# Altium PCB NIXIEclockhis.PcbDoc (part 3 of 3)
Units mil, origin at the board's own origin, x right, y up, seen from the top; angles counter-clockwise.
Board outline 8475 x 2960 mil, 2 copper layers (Top Layer, Bottom Layer); 232 components, 292 nets, 854 pads, 247 vias.
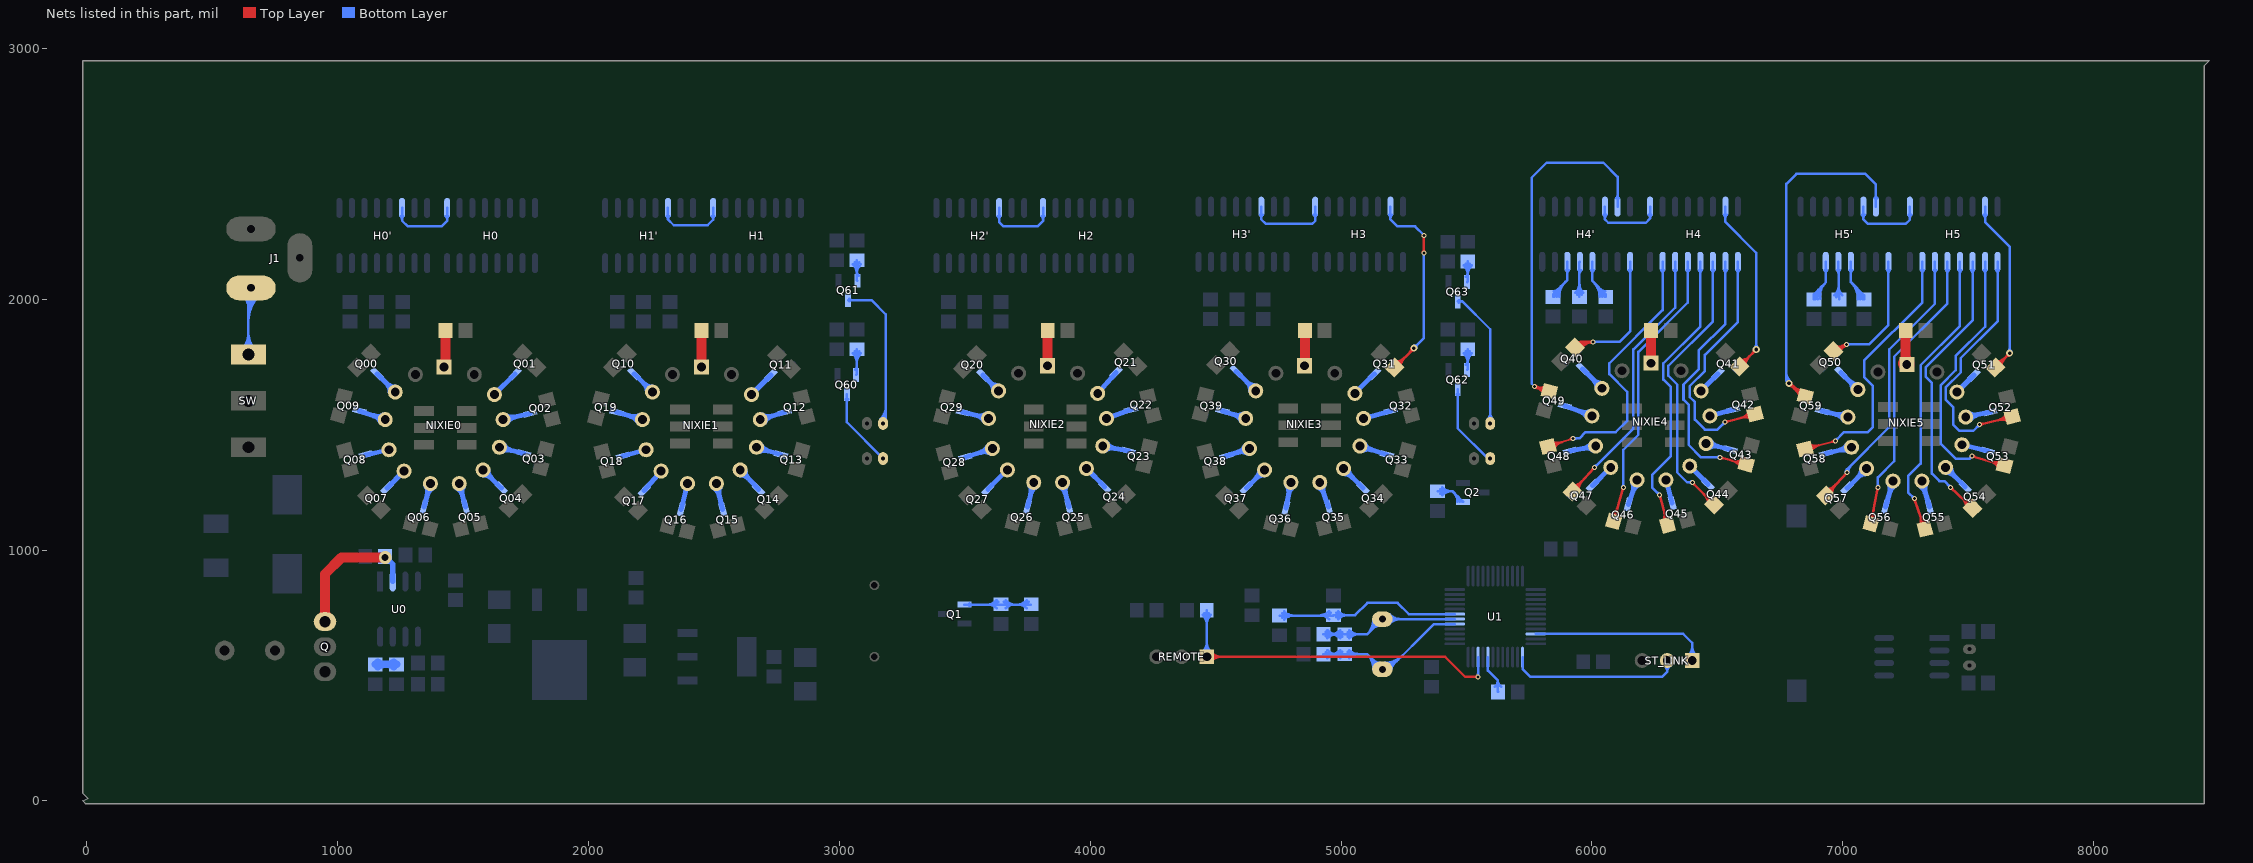
[diagram p3: the nets of this part, all layers, seen from the top]

## Via types
v1: diameter 20, hole 12, Top Layer to Bottom Layer, 132 vias
v2: diameter 28, hole 15, Top Layer to Bottom Layer, 84 vias
v3: diameter 30, hole 20, Top Layer to Bottom Layer, 23 vias
v4: diameter 118.11, hole 118.11, Top Layer to Bottom Layer, 4 vias
v5: diameter 50, hole 28, Top Layer to Bottom Layer, 2 vias
v6: diameter 59.06, hole 59.06, Top Layer to Bottom Layer, 2 vias

## Nets (pads, with @x,y where several pads share a name; then routed paths per layer and width w, separated by ;. In a path a pad name is that pad's centre, name@x,y a point inside that pad or via, vN(x,y) a via of type N, cw(c..) or ccw(c..) an arc to the next point about the centre after c; other vN are vias at no path point) (continued)
NetH3_15: H3.15 R90.2 | length 1047.4
  Top Layer w10: R90.2@5212.84,1727.16 5290,1804.32 v2(5290,1805) ; R90.2@5214.23,1741.11 ccw(c5214.23,1771.43) 5235.67,1749.99 ccw(c5257.11,1728.55) R90.2@5226.79,1728.55 ; R90.2@5214.23,1751.11 ccw(c5214.23,1805.57) 5252.74,1767.06 ccw(c5291.25,1728.55) R90.2@5236.79,1728.55 ; 5274.16,1788.48 ccw(c5257.64,1805) v2@5281,1805 ; 5275.79,1790.12 cw(c5290,1775.91) v2@5290,1796 ; v1@5326.46,2188.54 ccw(c5317.93,2197.07) 5330,2197.07 ccw(c5342.07,2197.07) v1@5333.54,2188.54 ; v1@5326.46,2251.46 cw(c5317.93,2242.93) 5330,2242.93 cw(c5342.07,2242.93) v1@5333.54,2251.46 ; v1@5330,2190 v1@5330,2250
  Bottom Layer w10: H3.15@5192.05,2336.05 cw(c5180.1,2324.1) 5197,2324.1 cw(c5213.9,2324.1) H3.15@5201.95,2336.05 ; H3.15@5197,2369 5197,2318 5225,2290 5295,2290 v1(5330,2255) v1@5330,2260 ; v2(5290,1805) 5330,1845 v1(5330,2185) ; v2@5290,1814 ccw(c5290,1835.73) 5305.36,1820.36 ccw(c5320.73,1805) v2@5299,1805
NetH4'_1: H4'.1 R106.1 | length 838.6
  Top Layer w10: R106.1@5927.42,1809.45 cw(c5958.96,1795.53) 5958.96,1830 ; R106.1@5932.84,1807.84 5955,1830 ; R106.1@5936.57,1805.41 cw(c5974.3,1788.75) 5974.3,1830 ; R106.1@5942.9,1828.03 ccw(c5947.58,1837.42) 5955,1830 ; R106.1@5945.72,1801.37 cw(c5989.65,1781.98) 5989.65,1830 ; R106.1@5953.03,1817.9 cw(c5962.42,1822.58) 5955,1830 ; R106.1@5954.87,1797.34 cw(c6005,1775.2) v1(6005,1830) 5955,1830 ; v1@6000.67,1832.5 cw(c5990.22,1838.53) 5993.34,1826.88 cw(c5996.46,1815.21) v1@6002.5,1825.67 ; v1@6001.46,1826.46 ccw(c5992.93,1817.93) 5992.93,1830 ccw(c5992.93,1842.07) v1@6001.46,1833.54
  Bottom Layer w10: v1(6005,1830) 6110,1830 6152,1872 H4'.1@6152,2149 ; v1@6008.54,1826.46 cw(c6017.07,1817.93) 6017.07,1830 cw(c6017.07,1842.07) v1@6008.54,1833.54 ; H4'.1@6147.05,2116.05 cw(c6135.1,2104.1) 6152,2104.1 cw(c6168.9,2104.1) H4'.1@6156.95,2116.05
NetH4'_4: H4'.4 R107.1 | length 350.1
  Bottom Layer w10: H4'.4@5997.05,2116.05 cw(c5985.1,2104.1) 6002,2104.1 cw(c6018.9,2104.1) H4'.4@6006.95,2116.05 ; H4'.4@6002,2149 6002,2073 6055,2020 R107.1@6055,2009.37 ; 6005.61,2069.39 cw(c5945.6,2009.37) R107.1@6030.47,2009.37 ; 6022.68,2052.32 cw(c5979.74,2009.37) R107.1@6040.47,2009.37 ; 6036.03,2038.97 ccw(c6053.03,2055.98) R107.1@6053.03,2031.93 ; R107.1@6039.75,2035.25 cw(c6013.88,2009.37) R107.1@6050.47,2009.37
NetH4'_5: H4'.5 R108.1 | length 300.2
  Bottom Layer w10: R108.1@5934.05,2025.32 ccw(c5895.54,2063.83) 5950,2063.83 ccw(c6004.46,2063.83) R108.1@5965.95,2025.32 ; R108.1@5941.12,2018.25 ccw(c5919.68,2039.69) 5950,2039.69 ccw(c5980.32,2039.69) R108.1@5958.88,2018.25 ; H4'.5@5947.05,2116.05 cw(c5939.93,2108.93) 5950,2108.93 ; R108.1@5950,2009.37 5950,2147 H4'.5@5952,2149 ; 5950,2099.27 cw(c5973.73,2099.27) H4'.5@5956.95,2116.05
NetH4'_6: H4'.6 R109.1 | length 351.8
  Bottom Layer w10: R109.1@5845,2009.37 5845,2020 5902,2077 H4'.6@5902,2149 ; R109.1@5846.97,2031.93 ccw(c5846.97,2055.98) 5863.97,2038.97 ; R109.1@5849.53,2009.37 cw(c5886.12,2009.37) R109.1@5860.25,2035.25 ; R109.1@5859.53,2009.37 cw(c5920.26,2009.37) 5877.32,2052.32 ; R109.1@5869.53,2009.37 cw(c5954.4,2009.37) 5894.39,2069.39 ; H4'.6@5897.05,2116.05 cw(c5885.1,2104.1) 5902,2104.1 cw(c5918.9,2104.1) H4'.6@5906.95,2116.05
NetH4'_15: H4'.15 R110.2 | length 1613.2
  Top Layer w10: v1(5771.96,1651.26) R110.2@5830.19,1633.03 ; v1@5773.05,1646.38 cw(c5776.54,1630.81) 5785.08,1644.28 ; v1@5774.28,1646.83 cw(c5779.87,1636.13) 5783.48,1647.65 cw(c5787.08,1659.17) v1@5776.39,1653.57 ; v1@5775.64,1654.64 ccw(c5787.63,1665.68) 5786.96,1649.39 ; v1@5776.15,1649.94 cw(c5759.8,1597.7) R110.2@5808.3,1623.08 ; v1@5776.53,1649.83 ccw(c5792.71,1701.54) R110.2@5817.83,1653.53 ; 5799.19,1642.73 cw(c5790.05,1613.53) R110.2@5817.16,1627.72 ; 5799.57,1642.61 ccw(c5808.54,1671.28) R110.2@5822.47,1644.67
  Bottom Layer w10: v1(5771.96,1651.26) 5760,1663.22 5760,2485 5820,2545 6045,2545 6102,2488 H4'.15@6102,2369 ; H4'.15@6097.05,2401.95 ccw(c6085.1,2413.9) 6102,2413.9 ccw(c6118.9,2413.9) H4'.15@6106.95,2401.95
NetH4_1: H4.1 R98.1 | length 1187.8
  Top Layer w10: v1(6530,1510) R98.1@6650.19,1541.97 ; v1@6532.51,1514.33 ccw(c6538.56,1524.77) 6541.67,1513.1 ccw(c6544.77,1501.44) v1@6534.33,1507.49 ; R98.1@6628.77,1552.78 cw(c6581.67,1580.09) 6595.66,1527.47 cw(c6609.65,1474.82) R98.1@6636.97,1521.95 ; R98.1@6637.42,1547.76 cw(c6611.2,1562.96) 6618.99,1533.67 cw(c6626.78,1504.36) R98.1@6641.99,1530.6
  Bottom Layer w10: v1@6525,1510 cw(c6512.93,1510) 6521.46,1501.46 cw(c6530,1492.93) v1@6530,1505 ; v1(6530,1510) 6500,1480 6450,1480 6410,1520 6410,1590 6390,1610 6390,1653.64 6450,1713.64 6450,1778 6582,1910 H4.1@6582,2149 ; H4.1@6577.05,2116.05 cw(c6565.1,2104.1) 6582,2104.1 cw(c6598.9,2104.1) H4.1@6586.95,2116.05
NetH4_2: H4.2 R99.1 | length 1258.3
  Top Layer w10: v1(6510,1370) R99.1@6614.81,1341.97 ; v1@6512.5,1365.67 cw(c6518.54,1355.22) 6521.66,1366.88 cw(c6524.78,1378.54) v1@6514.33,1372.5 ; R99.1@6593.38,1331.19 ccw(c6546.23,1303.94) 6560.3,1356.55 ccw(c6574.36,1409.17) R99.1@6601.62,1362.01 ; R99.1@6602.04,1336.2 ccw(c6575.79,1321.02) 6583.62,1350.31 ccw(c6591.45,1379.61) R99.1@6606.62,1353.35
  Bottom Layer w10: v1@6506.46,1366.46 ccw(c6497.93,1357.93) 6497.93,1370 ccw(c6497.93,1382.07) v1@6506.46,1373.54 ; v1(6510,1370) 6435,1370 6385,1420 6385,1580 6365,1600 6365,1660 6425,1720 6425,1795 6532,1902 H4.2@6532,2149 ; H4.2@6527.05,2116.05 cw(c6515.1,2104.1) 6532,2104.1 cw(c6548.9,2104.1) H4.2@6536.95,2116.05
NetH4_3: H4.3 R100.1 | length 1324.8
  Top Layer w10: v1@6399.98,1265 cw(c6399.93,1252.93) 6408.5,1261.43 cw(c6417.07,1269.93) v1@6405,1269.98 ; v1(6400,1270) R100.1@6487.16,1182.16 ; 6447.4,1222.23 cw(c6408.72,1183.85) R100.1@6463.21,1183.64 ; 6447.43,1222.2 ccw(c6486.07,1260.55) R100.1@6485.86,1206.11 ; 6464.41,1205.09 cw(c6442.86,1183.72) R100.1@6473.21,1183.6 ; 6464.43,1205.07 ccw(c6485.94,1226.41) R100.1@6485.82,1196.11
  Bottom Layer w10: v1@6396.46,1266.46 ccw(c6387.93,1257.93) 6387.93,1270 ccw(c6387.93,1282.07) v1@6396.46,1273.54 ; v1(6400,1270) 6380,1270 6340,1310 6340,1660 6305,1695 6305,1735 6482,1912 H4.3@6482,2149 ; H4.3@6477.05,2116.05 cw(c6465.1,2104.1) 6482,2104.1 cw(c6498.9,2104.1) H4.3@6486.95,2116.05
NetH4_4: H4.4 R101.1 | length 1367.8
  Top Layer w10: v1@6267.49,1215.67 cw(c6261.44,1205.23) 6273.1,1208.33 cw(c6284.77,1211.44) v1@6274.33,1217.49 ; v1(6270,1220) R101.1@6301.97,1099.81 ; R101.1@6281.95,1113.03 ccw(c6234.82,1140.35) 6287.46,1154.35 ccw(c6340.09,1168.33) R101.1@6312.78,1121.23 ; R101.1@6290.6,1108.01 ccw(c6264.36,1123.22) 6293.67,1131.02 ccw(c6322.96,1138.8) R101.1@6307.76,1112.58
  Bottom Layer w10: v1@6265,1220 ccw(c6252.93,1220) 6261.46,1228.54 ccw(c6270,1237.07) v1@6270,1225 ; v1(6270,1220) 6240,1250 6240,1300 6315,1375 6315,1650 6285,1680 6285,1745 6432,1892 H4.4@6432,2149 ; H4.4@6427.05,2116.05 cw(c6415.1,2104.1) 6432,2104.1 cw(c6448.9,2104.1) H4.4@6436.95,2116.05
NetH4_5: H4.5 R102.1 | length 1343.2
  Top Layer w10: R102.1@6076.46,1136.77 ccw(c6049.81,1184.37) 6102.31,1169.56 ; R102.1@6081.34,1128.05 ccw(c6066.49,1154.58) 6095.75,1146.33 ; R102.1@6086.97,1115.19 v1(6125,1250) ; 6095.72,1146.21 ccw(c6124.82,1138) R102.1@6098.44,1123.23 ; 6102.27,1169.44 ccw(c6154.61,1154.68) R102.1@6107.16,1128.11 ; v1@6120.64,1247.56 cw(c6110.11,1241.66) 6121.72,1238.38 cw(c6133.34,1235.11) v1@6127.44,1245.64
  Bottom Layer w10: v1@6121.46,1253.54 ccw(c6112.93,1262.07) 6125,1262.07 ccw(c6137.07,1262.07) v1@6128.54,1253.54 ; v1(6125,1250) 6125,1400 6185,1460 6185,1790 6382,1987 H4.5@6382,2149 ; H4.5@6377.05,2116.05 cw(c6365.1,2104.1) 6382,2104.1 cw(c6398.9,2104.1) H4.5@6386.95,2116.05
NetH4_6: H4.6 R103.1 | length 1281
  Top Layer w10: R103.1@5922.16,1232.84 v1(6010,1330) ; R103.1@5922.42,1256.76 ccw(c5919.69,1310.82) 5959.84,1274.52 ; R103.1@5922.92,1246.77 ccw(c5921.41,1276.72) 5943.65,1256.61 ; R103.1@5936.1,1234.86 cw(c5966.72,1236.41) 5943.97,1256.97 ; R103.1@5946.08,1235.37 cw(c6000.81,1238.12) 5960.16,1274.87 ; v1@6005.01,1329.75 cw(c5992.95,1329.14) 6001.9,1321.05 cw(c6010.86,1312.95) v1@6010.25,1325.01
  Bottom Layer w10: v1(6010,1330) 6165,1485 6165,1800 6332,1967 H4.6@6332,2149 ; v1@6010,1335 ccw(c6010,1347.07) 6018.54,1338.54 ccw(c6027.07,1330) v1@6015,1330 ; H4.6@6327.05,2116.05 cw(c6315.1,2104.1) 6332,2104.1 cw(c6348.9,2104.1) H4.6@6336.95,2116.05
NetH4_7: H4.7 R104.1 | length 1297.6
  Top Layer w10: R104.1@5824.81,1413.03 v1(5925,1445) ; R104.1@5832.47,1424.7 ccw(c5846.23,1451.36) 5855.36,1422.78 ; R104.1@5837.06,1433.58 ccw(c5861.89,1481.7) 5878.36,1430.12 ; R104.1@5837.87,1407.78 cw(c5865.1,1393.73) 5855.78,1422.91 ; R104.1@5846.76,1403.19 cw(c5895.43,1378.07) 5878.78,1430.25 ; v1@5920.56,1447.29 cw(c5909.83,1452.83) 5913.5,1441.33 cw(c5917.17,1429.83) v1@5922.71,1440.56
  Bottom Layer w10: v1(5925,1445) 5950,1445 5975,1470 6095,1470 6140,1515 6140,1631.36 6070,1701.36 6070,1745 6282,1957 H4.7@6282,2149 ; v1@5928.54,1441.46 cw(c5937.07,1432.93) 5937.07,1445 cw(c5937.07,1457.07) v1@5928.54,1448.54 ; H4.7@6277.05,2116.05 cw(c6265.1,2104.1) 6282,2104.1 cw(c6298.9,2104.1) H4.7@6286.95,2116.05
NetH4_15: H4.15 R105.2 | length 943.6
  Top Layer w10: R105.2@6587.84,1732.16 6655,1799.32 v2(6655,1800) ; R105.2@6589.23,1746.11 ccw(c6589.23,1776.43) 6610.67,1754.99 ccw(c6632.11,1733.55) R105.2@6601.79,1733.55 ; R105.2@6589.23,1756.11 ccw(c6589.23,1810.57) 6627.74,1772.06 ccw(c6666.25,1733.55) R105.2@6611.79,1733.55 ; 6639.16,1783.48 ccw(c6622.64,1800) v2@6646,1800 ; 6640.79,1785.12 cw(c6655,1770.91) v2@6655,1791
  Bottom Layer w10: H4.15@6527.05,2336.05 cw(c6515.1,2324.1) 6532,2324.1 cw(c6548.9,2324.1) H4.15@6536.95,2336.05 ; H4.15@6532,2369 6532,2308 6655,2185 v2(6655,1800) ; v2@6648.64,1806.36 ccw(c6633.27,1821.73) 6655,1821.73 ccw(c6676.73,1821.73) v2@6661.36,1806.36
NetH5'_1: H5'.1 R119.1 | length 722.8
  Top Layer w10: R119.1@6962.84,1792.84 v1(7015,1820) ; R119.1@6971.01,1812.96 ccw(c6985.46,1858.79) v1@7007.65,1816.17 ; R119.1@6976.21,1787.67 cw(c7011.24,1776.63) 6994.28,1809.21 ; R119.1@6985.75,1784.67 cw(c7043.8,1766.37) v1@7015.69,1820.36 ; 6998.62,1814.17 ccw(c6994.42,1833.1) v1@7010.78,1822.69 ; 7005.88,1811.37 ccw(c6997.26,1820.77) v1@7010,1820.22 ; 7006.6,1812.02 cw(c7014.29,1803.63) v1@7014.78,1815 ; v1@7010.23,1821.5 cw(c6998.72,1825.13) 7004.29,1814.42 cw(c7009.87,1803.72) v1@7013.5,1815.23
  Bottom Layer w10: v1(7015,1820) 7105,1820 7182,1897 H5'.1@7182,2149 ; v1@7018.54,1816.46 cw(c7027.07,1807.93) 7027.07,1820 cw(c7027.07,1832.07) v1@7018.54,1823.54 ; H5'.1@7177.05,2116.05 cw(c7165.1,2104.1) 7182,2104.1 cw(c7198.9,2104.1) H5'.1@7186.95,2116.05
NetH5'_4: H5'.4 R121.1 | length 369.7
  Bottom Layer w10: H5'.4@7027.05,2116.05 cw(c7015.1,2104.1) 7032,2104.1 cw(c7048.9,2104.1) H5'.4@7036.95,2116.05 ; H5'.4@7032,2149 7032,2068 7085,2015 R121.1@7085,1999.37 ; 7032.08,2067.92 cw(c6963.52,1999.37) R121.1@7060.47,1999.37 ; 7049.15,2050.85 cw(c6997.67,1999.37) R121.1@7070.47,1999.37 ; 7066.22,2033.78 cw(c7031.81,1999.37) R121.1@7080.47,1999.37
NetH5'_5: H5'.5 R122.1 | length 290.8
  Bottom Layer w10: R122.1@6966.76,2015 ccw(c6922.64,2057.38) 6983.81,2058.61 ; R122.1@6973.97,2008.07 ccw(c6947.26,2033.73) 6984.3,2034.47 ; H5'.5@6977.15,2115.95 cw(c6964.12,2102.38) 6982.93,2102.76 ; H5'.5@6982,2149 R122.1@6985,1999.37 ; 6982.87,2105.47 cw(c6997.85,2105.77) H5'.5@6987.05,2116.15 ; 6984,2049.11 ccw(c7031.74,2050.07) R122.1@6998.66,2015.64
NetH5'_6: H5'.6 R123.1 | length 365.1
  Bottom Layer w10: R123.1@6885,1999.37 6885,2020 6932,2067 ; R123.1@6889.51,1999.67 cw(c6935.51,2005.02) 6902.77,2037.77 ; R123.1@6899.44,2000.82 cw(c6961.7,2008.06) 6917.38,2052.38 ; R123.1@6909.38,2001.98 cw(c6987.89,2011.11) 6932,2067 ; H5'.6@6927.05,2116.05 cw(c6915.1,2104.1) 6932,2104.1 cw(c6948.9,2104.1) H5'.6@6936.95,2116.05 ; H5'.6@6932,2149 6932,2067
NetH5'_15: H5'.15 R124.2 | length 1688.5
  Top Layer w10: v2@6785,1656 cw(c6785,1634.27) 6800.36,1649.64 cw(c6815.73,1665) v2@6794,1665 ; v2(6785,1665) 6836.97,1613.03 R124.2@6850.19,1613.03 ; v2@6787.3,1656.3 cw(c6791.4,1640.76) 6799.49,1654.65 ; v2@6789.59,1660.41 ccw(c6848.29,1719.11) R124.2@6848.29,1636.1 ; v2@6793.7,1667.3 ccw(c6820.18,1674.3) 6806.4,1650.62 ; 6806.66,1643.34 ccw(c6848.29,1684.97) R124.2@6848.29,1626.1 ; 6818.14,1631.86 cw(c6799.82,1613.54) R124.2@6825.73,1613.54 ; R124.2@6823.73,1626.27 ccw(c6848.29,1650.83) R124.2@6848.29,1616.1
  Bottom Layer w10: 6775,1686.73 ccw(c6806.73,1686.73) v2@6784.29,1664.29 ; 6775,1710.87 ccw(c6830.87,1710.87) v2@6791.36,1671.36 ; v2(6785,1665) 6775,1675 6775,2460 6815,2500 7090,2500 7132,2458 H5'.15@7132,2369 ; H5'.15@7127.05,2401.95 ccw(c7115.1,2413.9) 7132,2413.9 ccw(c7148.9,2413.9) H5'.15@7136.95,2401.95
NetH5_1: H5.1 R111.1 | length 1204.6
  Top Layer w10: v1(7545,1500) R111.1@7675.19,1531.97 ; v1@7547.59,1504.28 ccw(c7553.84,1514.6) 7556.72,1502.88 ccw(c7559.6,1491.16) v1@7549.28,1497.41 ; 7620.29,1518.49 cw(c7633.31,1465.46) R111.1@7661.6,1512.17 ; 7620.48,1518.54 ccw(c7607.53,1571.29) R111.1@7653.99,1543.15 ; 7643.74,1524.25 cw(c7651,1494.66) R111.1@7666.78,1520.72 ; 7643.93,1524.29 ccw(c7636.73,1553.6) R111.1@7662.55,1537.97
  Bottom Layer w10: v1@7540,1500 cw(c7527.93,1500) 7536.46,1491.46 cw(c7545,1482.93) v1@7545,1495 ; v1(7545,1500) 7520,1475 7465,1475 7440,1500 7440,1570 7410,1600 7410,1648.64 7470,1708.64 7470,1765 7617,1912 H5.1@7617,2149 ; H5.1@7612.05,2116.05 cw(c7600.1,2104.1) 7617,2104.1 cw(c7633.9,2104.1) H5.1@7621.95,2116.05
NetH5_2: H5.2 R112.1 | length 1265.3
  Top Layer w10: v1(7515,1375) R112.1@7644.81,1336.97 ; v1@7517.4,1370.61 cw(c7523.19,1360.02) 7526.58,1371.61 cw(c7529.98,1383.19) v1@7519.39,1377.4 ; 7590.55,1352.87 cw(c7575.2,1300.45) R112.1@7623.12,1326.66 ; 7590.76,1352.81 ccw(c7606.03,1404.92) R112.1@7632.09,1357.27 ; 7613.72,1346.08 cw(c7605.15,1316.83) R112.1@7631.89,1331.46 ; 7613.93,1346.02 ccw(c7622.41,1374.97) R112.1@7636.88,1348.5
  Bottom Layer w10: v1(7515,1375) 7505,1365 7450,1365 7390,1425 7390,1656.92 7450,1716.92 7450,1773.28 7567,1890.28 H5.2@7567,2149 ; H5.2@7562.05,2116.05 cw(c7550.1,2104.1) 7567,2104.1 cw(c7583.9,2104.1) H5.2@7571.95,2116.05
NetH5_3: H5.3 R113.1 | length 1347.5
  Top Layer w10: v1(7430,1250) R113.1@7517.16,1167.16 ; v1@7430.13,1245 cw(c7430.43,1232.93) 7438.75,1241.68 cw(c7447.07,1250.43) v1@7435,1250.13 ; 7476.17,1206.12 ccw(c7513.81,1245.72) R113.1@7515.2,1191.1 ; 7476.35,1205.95 cw(c7438.94,1166.6) R113.1@7493.22,1167.98 ; 7493.67,1189.49 ccw(c7514.67,1211.59) R113.1@7515.45,1181.11 ; 7493.84,1189.32 cw(c7473.07,1167.47) R113.1@7503.21,1168.23
  Bottom Layer w10: v1@7425,1250 ccw(c7412.93,1250) 7421.46,1258.54 ccw(c7430,1267.07) v1@7430,1255 ; v1(7430,1250) 7405,1275 7385,1275 7355,1305 7355,1666.36 7330,1691.36 7330,1728.64 7517,1915.64 H5.3@7517,2149 ; H5.3@7512.05,2116.05 cw(c7500.1,2104.1) 7517,2104.1 cw(c7533.9,2104.1) H5.3@7521.95,2116.05
NetH5_4: H5.4 R114.1 | length 1365
  Top Layer w10: v1@7282.83,1200.5 cw(c7277.58,1189.62) 7288.98,1193.6 cw(c7300.38,1197.58) v1@7289.5,1202.83 ; v1(7285,1205) R114.1@7326.97,1084.81 ; R114.1@7306.14,1096.51 ccw(c7257.54,1119.96) 7308.48,1137.75 ; 7308.25,1138.41 ccw(c7360.14,1156.53) R114.1@7336.26,1107.03 ; R114.1@7315.15,1092.17 ccw(c7288.29,1105.12) 7316.44,1114.96 ; 7316.21,1115.62 ccw(c7345.31,1125.78) R114.1@7331.92,1098.02
  Bottom Layer w10: v1@7280,1205 ccw(c7267.93,1205) 7276.46,1213.54 ccw(c7285,1222.07) v1@7285,1210 ; v1(7285,1205) 7260,1230 7260,1295 7310,1345 7310,1736.92 7467,1893.92 H5.4@7467,2149 ; H5.4@7462.05,2116.05 cw(c7450.1,2104.1) 7467,2104.1 cw(c7483.9,2104.1) H5.4@7471.95,2116.05
NetH5_5: H5.5 R115.1 | length 1358.9
  Top Layer w10: R115.1@7099.85,1125.78 ccw(c7069.63,1170.52) 7122.63,1160.26 ; R115.1@7105.45,1117.5 ccw(c7088.74,1142.23) 7118.04,1136.56 ; R115.1@7111.97,1105.19 v1(7140,1250) ; 7118.17,1137.21 ccw(c7148.4,1131.36) R115.1@7122.89,1114.12 ; 7122.76,1160.92 ccw(c7176.69,1150.48) R115.1@7131.17,1119.72 ; v1@7135.86,1247.2 cw(c7125.85,1240.44) 7137.71,1238.15 cw(c7149.56,1235.86) v1@7142.8,1245.86
  Bottom Layer w10: v1@7136.46,1253.54 ccw(c7127.93,1262.07) 7140,1262.07 ccw(c7152.07,1262.07) v1@7143.54,1253.54 ; v1(7140,1250) 7140,1290 7205,1355 7205,1771.21 7417,1983.21 H5.5@7417,2149 ; H5.5@7412.05,2116.05 cw(c7400.1,2104.1) 7417,2104.1 cw(c7433.9,2104.1) H5.5@7421.95,2116.05
NetH5_6: H5.6 R116.1 | length 1329.1
  Top Layer w10: R116.1@6932.16,1217.84 v1(7016.36,1310) ; R116.1@6932.54,1241.77 ccw(c6930.09,1295.87) 6970.08,1259.34 ; R116.1@6932.99,1231.78 ccw(c6931.63,1261.76) 6953.79,1241.52 ; R116.1@6946.1,1219.8 cw(c6976.69,1221.18) 6954.08,1241.83 ; R116.1@6956.09,1220.25 cw(c7010.8,1222.72) 6970.37,1259.66
  Bottom Layer w10: v1@7011.36,1310 cw(c7026.72,1310) 7015.86,1320.86 ; v1@7012.98,1313.69 ccw(c7005.96,1321.36) 7016.36,1321.36 ; v1(7016.36,1310) 7016.36,1321.36 ; v1@7019.74,1313.69 cw(c7026.77,1321.36) 7016.36,1321.36 ; v1@7021.36,1310 cw(c7060.86,1310) 7032.93,1337.93 ; H5.6@7362.05,2116.05 cw(c7350.1,2104.1) 7367,2104.1 cw(c7383.9,2104.1) H5.6@7371.95,2116.05 ; H5.6@7367,2149 7367,1982 7185,1800 7185,1490 7016.36,1321.36
NetH5_7: H5.7 R117.1 | length 1264.4
  Top Layer w10: R117.1@6849.81,1403.03 v1(6970,1435) ; R117.1@6858.01,1414.4 ccw(c6873.22,1440.64) 6881.02,1411.33 ccw(c6888.8,1382.04) R117.1@6862.58,1397.24 ; R117.1@6863.03,1423.05 ccw(c6890.35,1470.18) 6904.35,1417.54 ccw(c6918.33,1364.91) R117.1@6871.23,1392.22 ; v1@6965.67,1437.51 cw(c6955.23,1443.56) 6958.33,1431.9 cw(c6961.44,1420.23) v1@6967.49,1430.67
  Bottom Layer w10: v1(6970,1435) 7005,1470 7100,1470 7120,1490 7120,1655 7085,1690 7085,1755 7317,1987 H5.7@7317,2149 ; v1@6970,1440 ccw(c6970,1452.07) 6978.54,1443.54 ccw(c6987.07,1435) v1@6975,1435 ; H5.7@7312.05,2116.05 cw(c7300.1,2104.1) 7317,2104.1 cw(c7333.9,2104.1) H5.7@7321.95,2116.05
NetH5_15: H5.15 R118.2 | length 934.1
  Top Layer w10: R118.2@7607.84,1727.16 7665,1784.32 v2(7665,1785) ; R118.2@7609.23,1741.11 ccw(c7609.23,1771.43) 7630.67,1749.99 ccw(c7652.11,1728.55) R118.2@7621.79,1728.55 ; R118.2@7609.23,1751.11 ccw(c7609.23,1805.57) 7647.74,1767.06 ccw(c7686.25,1728.55) R118.2@7631.79,1728.55 ; 7649.16,1768.48 ccw(c7632.64,1785) v2@7656,1785 ; 7650.79,1770.12 cw(c7665,1755.91) v2@7665,1776
  Bottom Layer w10: H5.15@7562.05,2336.05 cw(c7550.1,2324.1) 7567,2324.1 cw(c7583.9,2324.1) H5.15@7571.95,2336.05 ; H5.15@7567,2369 7567,2308 7665,2210 v2(7665,1785) ; v2@7658.64,1791.36 ccw(c7643.27,1806.73) 7665,1806.73 ccw(c7686.73,1806.73) v2@7671.36,1791.36
NetJ1_1: J1.1 SW.3 | length 915.8
  Bottom Layer w10: SW.3@620.7,1804.3 ccw(c562.02,1862.98) 645,1862.98 ccw(c727.98,1862.98) SW.3@669.3,1804.3 ; J1.1@623.74,2013.74 cw(c572.4,1962.4) 645,1962.4 cw(c737.6,1962.4) J1.1@672.12,2027.88 ; SW.3@627.77,1797.23 ccw(c586.17,1838.83) 645,1838.83 ccw(c703.83,1838.83) SW.3@662.23,1797.23 ; J1.1@630.81,2020.81 cw(c596.55,1986.55) 645,1986.55 cw(c713.45,1986.55) J1.1@665.05,2034.95 ; SW.3@645,1780 645,2035 J1.1@655,2045 ; 645,1914.12 cw(c785.88,1914.12) J1.1@686.26,2013.74 ; 645,1938.26 cw(c761.74,1938.26) J1.1@679.19,2020.81
NetNeon0_2: Neon0.2 Q60.1 | length 342.3
  Bottom Layer w10: Q60.1@3025.18,1601.05 cw(c3013.56,1589.42) 3030,1589.42 cw(c3046.44,1589.42) Q60.1@3034.82,1601.05 ; Q60.1@3030,1621.61 3030,1509.57 Neon0.2@3174.57,1365
NetNeon1_2: Neon1.2 Q61.1 | length 731.3
  Bottom Layer w10: Q61.1@3035,1996.61 3128.39,1996.61 3185,1940 3185,1515.43 Neon1.2@3174.57,1505 ; Q61.1@3039.82,1991.8 cw(c3051.44,1980.17) 3051.44,1996.61 cw(c3051.44,2013.06) Q61.1@3039.82,2001.43 ; Neon1.2@3164.18,1521.29 ccw(c3113.93,1571.55) 3185,1571.55 ; Neon1.2@3171.25,1514.22 ccw(c3138.07,1547.4) 3185,1547.4
NetNeon2_2: Neon2.2 Q62.1 | length 362.1
  Bottom Layer w10: Q62.1@5460.18,1621.05 cw(c5448.56,1609.42) 5465,1609.42 cw(c5481.44,1609.42) Q62.1@5469.82,1621.05 ; Q62.1@5465,1641.61 5465,1485 5585,1365 Neon2.2@5594.57,1365 Neon2.2@5594.57,1365.43
NetNeon3_2: Neon3.2 Q63.1 | length 632.6
  Bottom Layer w10: Q63.1@5465,1991.61 5483.39,1991.61 5594.57,1880.43 Neon3.2@5594.57,1505 ; Q63.1@5469.82,1986.8 cw(c5481.44,1975.17) 5481.44,1991.61 cw(c5481.44,2008.06) Q63.1@5469.82,1996.43 ; Neon3.2@5584.18,1521.29 ccw(c5559.11,1546.36) 5594.57,1546.36 ccw(c5630.02,1546.36) Neon3.2@5604.95,1521.29
NetNIXIE0_a: NIXIE0.a R130.1 | length 173.4
  Top Layer w40: NIXIE0.a@1417.93,1737.07 ccw(c1387.27,1767.73) 1430.63,1767.73 ; NIXIE0.a@1430.63,1735.63 R130.1@1430.63,1875
NetNIXIE1_a: NIXIE1.a R131.1 | length 144.4
  Top Layer w40: NIXIE1.a@2450.63,1730.63 R131.1@2450.63,1875
NetNIXIE2_a: NIXIE2.a R132.1 | length 139.4
  Top Layer w40: NIXIE2.a@3830.63,1735.63 R132.1@3830.63,1875
NetNIXIE3_a: NIXIE3.a R133.1 | length 139.4
  Top Layer w40: NIXIE3.a@4855.63,1735.63 R133.1@4855.63,1875
NetNIXIE4_a: NIXIE4.a R134.1 | length 129.4
  Top Layer w40: NIXIE4.a@6235,1745 R134.1@6235,1874.37
NetNIXIE5_a: NIXIE5.a R135.1 | length 167.5
  Top Layer w40: NIXIE5.a@7250.63,1744.37 R135.1@7250.63,1875 ; 7250.63,1774.69 ccw(c7289.69,1774.69) NIXIE5.a@7262.07,1747.07
  Top Layer w60: NIXIE5.a@7250.63,1744.37 NIXIE5.a@7255,1740
NetQ1_2: Q1.2 R160.2 R161.2 | length 634.4
  Bottom Layer w10: Q1.2@3498.39,782.4 R160.2@3763.03,782.4 ; Q1.2@3518.95,777.59 cw(c3530.58,765.96) 3530.58,782.4 cw(c3530.58,798.84) Q1.2@3518.95,787.22 ; 3583.82,782.4 ccw(c3583.82,843.58) R161.2@3627.08,800.32 ; 3593.32,782.4 cw(c3593.32,734.66) R161.2@3627.08,768.42 ; 3607.96,782.4 ccw(c3607.96,819.44) R161.2@3634.15,793.25 ; R161.2@3655.85,793.25 ccw(c3682.04,819.44) 3682.04,782.4 ; R161.2@3662.92,768.42 cw(c3696.68,734.66) 3696.68,782.4 ; R161.2@3662.92,800.32 ccw(c3706.18,843.58) 3706.18,782.4 ; 3703.82,782.4 ccw(c3703.82,843.58) R160.2@3747.08,800.32 ; 3713.32,782.4 cw(c3713.32,734.66) R160.2@3747.08,768.42 ; 3727.96,782.4 ccw(c3727.96,819.44) R160.2@3754.15,793.25
NetQ2_2: Q2.2 R140.1 | length 323.5
  Bottom Layer w10: R140.1@5385,1234.37 5444.84,1234.37 Q2.2@5486.61,1192.6 ; R140.1@5395.85,1225.49 cw(c5417.29,1204.05) 5417.29,1234.37 cw(c5417.29,1264.69) R140.1@5395.85,1243.25 ; R140.1@5402.92,1218.42 cw(c5441.43,1179.91) 5441.43,1234.37 cw(c5441.43,1288.83) R140.1@5402.92,1250.32 ; 5448.1,1231.11 cw(c5409.59,1192.6) Q2.2@5464.06,1192.6 ; 5465.17,1214.04 cw(c5443.74,1192.6) Q2.2@5474.06,1192.6 ; Q2.2@5482.25,1196.97 cw(c5477.88,1192.6) Q2.2@5484.06,1192.6
NetQ60_3: Q60.3 R170.1 | length 256.4
  Bottom Layer w10: R170.1@3054.05,1784.68 cw(c3015.54,1746.17) 3070,1746.17 cw(c3124.46,1746.17) R170.1@3085.95,1784.68 ; R170.1@3061.12,1791.75 cw(c3039.68,1770.31) 3070,1770.31 cw(c3100.32,1770.31) R170.1@3078.88,1791.75 ; Q60.3@3062.59,1718.95 ccw(c3044.69,1736.85) 3070,1736.85 ; Q60.3@3067.4,1698.39 3070,1700.98 R170.1@3070,1800.63
NetQ61_3: Q61.3 R171.1 | length 235.8
  Bottom Layer w10: R171.1@3054.05,2139.68 cw(c3015.54,2101.17) 3070,2101.17 cw(c3124.46,2101.17) R171.1@3085.95,2139.68 ; R171.1@3061.12,2146.75 cw(c3039.68,2125.31) 3070,2125.31 cw(c3100.32,2125.31) R171.1@3078.88,2146.75 ; 3070,2111.37 ccw(c3094.64,2111.37) Q61.3@3077.22,2093.95 ; R171.1@3070,2155.63 3070,2075.79 Q61.3@3072.4,2073.39
NetQ62_3: Q62.3 R172.1 | length 236.4
  Bottom Layer w10: R172.1@5489.05,1784.68 cw(c5450.54,1746.17) 5505,1746.17 cw(c5559.46,1746.17) R172.1@5520.95,1784.68 ; R172.1@5496.12,1791.75 cw(c5474.68,1770.31) 5505,1770.31 cw(c5535.32,1770.31) R172.1@5513.88,1791.75 ; Q62.3@5497.59,1738.95 ccw(c5479.69,1756.85) 5505,1756.85 ; Q62.3@5502.4,1718.39 5505,1720.98 R172.1@5505,1800.63
NetQ63_3: Q63.3 R173.1 | length 236.4
  Bottom Layer w10: R173.1@5489.05,2134.68 cw(c5450.54,2096.17) 5505,2096.17 cw(c5559.46,2096.17) R173.1@5520.95,2134.68 ; R173.1@5496.12,2141.75 cw(c5474.68,2120.31) 5505,2120.31 cw(c5535.32,2120.31) R173.1@5513.88,2141.75 ; Q63.3@5497.59,2088.95 ccw(c5479.69,2106.85) 5505,2106.85 ; Q63.3@5502.4,2068.39 5505,2070.98 R173.1@5505,2150.63
NetQ_2: Q.3 R10.2 U0.2 | length 633.1
  Top Layer w10: v5(1189.37,970.63) v5@1190,970
  Top Layer w40: Q.3@937.63,727.37 ccw(c907.75,757.25) 950,757.25 ccw(c992.25,757.25) Q.3@962.37,727.37 ; Q.3@950,715 950,905 1015,970 v5@1189.37,970
  Bottom Layer w20: R10.2@1191.56,972.82 1220,944.37 U0.2@1220,875
NetR11_2: R11.2 R13.1 | length 180.3
  Bottom Layer w30: R13.1@1150,544.37 R11.2@1235,544.37 ; R13.1@1160.85,535.49 cw(c1182.29,514.05) 1182.29,544.37 cw(c1182.29,574.69) R13.1@1160.85,553.25 ; R11.2@1224.15,535.49 ccw(c1202.71,514.05) 1202.71,544.37 ccw(c1202.71,574.69) R11.2@1224.15,553.25
NetR22_1: R22.1 U1.44 | length 212.7
  Bottom Layer w10: U1.44@5585.47,573.58 5585.47,519.53 5625,480 ; R22.1@5612.37,455.22 ccw(c5594.38,480) 5625,480 ; R22.1@5625.63,435 5625,435.63 5625,480 ; R22.1@5638.03,455.81 cw(c5653.96,480) 5625,480
NIXIE0.0: NIXIE0.l Q00.1 | length 178.9
  Bottom Layer w20: Q00.1@1157.14,1702.86 NIXIE0.l@1230,1630 ; NIXIE0.l@1210,1630 ccw(c1161.72,1630) 1195.86,1664.14 ccw(c1230,1698.28) NIXIE0.l@1230,1650
NIXIE0.1: NIXIE0.c Q01.1 | length 117.2
  Bottom Layer w20: NIXIE0.c@1625,1620 Q01.1@1707.86,1702.86
NIXIE0.2: NIXIE0.d Q02.1 | length 186.6
  Bottom Layer w20: NIXIE0.d@1660,1520 Q02.1@1767.92,1545.07 ; NIXIE0.d@1670.58,1536.97 ccw(c1696.11,1577.96) 1707.03,1530.92 ccw(c1717.96,1483.89) NIXIE0.d@1676.97,1509.42
NIXIE0.3: NIXIE0.e Q03.1 | length 176.9
  Bottom Layer w20: NIXIE0.e@1645,1410 Q03.1@1742.92,1384.93 ; NIXIE0.e@1655.19,1392.79 cw(c1679.8,1351.25) 1691.78,1398.03 cw(c1703.75,1444.8) NIXIE0.e@1662.21,1420.19
NIXIE0.4: NIXIE0.f Q04.1 | length 178.9
  Bottom Layer w20: NIXIE0.f@1580,1300 cw(c1580,1251.72) 1614.14,1285.86 cw(c1648.28,1320) NIXIE0.f@1600,1320 ; NIXIE0.f@1580,1320 Q04.1@1652.86,1247.14
NIXIE0.5: NIXIE0.g Q05.1 | length 172.1
  Bottom Layer w20: NIXIE0.g@1475.03,1247.66 cw(c1450.96,1205.81) 1497.57,1218.38 cw(c1544.19,1230.96) NIXIE0.g@1502.34,1255.03 ; NIXIE0.g@1485,1265 Q05.1@1510.07,1172.08
NIXIE0.6: NIXIE0.h Q06.1 | length 172.1
  Bottom Layer w20: Q06.1@1344.93,1172.08 NIXIE0.h@1370,1265 ; NIXIE0.h@1352.66,1255.03 cw(c1310.81,1230.96) 1357.43,1218.38 cw(c1404.04,1205.81) NIXIE0.h@1379.97,1247.66
NIXIE0.7: NIXIE0.i Q07.1 | length 96
  Bottom Layer w20: Q07.1@1197.14,1247.14 NIXIE0.i@1265,1315
NIXIE0.8: NIXIE0.j Q08.1 | length 95.1
  Bottom Layer w20: Q08.1@1112.08,1379.93 NIXIE0.j@1205,1400
NIXIE0.9: NIXIE0.k Q09.1 | length 184.6
  Bottom Layer w20: Q09.1@1087.08,1555.07 NIXIE0.k@1190,1520 ; NIXIE0.k@1172.05,1511.17 ccw(c1128.72,1489.87) 1144.3,1535.57 ccw(c1159.87,1581.28) NIXIE0.k@1181.17,1537.95
NIXIE1.0: NIXIE1.l Q10.1 | length 178.9
  Bottom Layer w20: Q10.1@2182.14,1702.86 NIXIE1.l@2255,1630 ; NIXIE1.l@2235,1630 ccw(c2186.72,1630) 2220.86,1664.14 ccw(c2255,1698.28) NIXIE1.l@2255,1650
NIXIE1.1: NIXIE1.c Q11.1 | length 110.1
  Bottom Layer w20: NIXIE1.c@2650,1620 Q11.1@2727.86,1697.86
NIXIE1.2: NIXIE1.d Q12.1 | length 178.3
  Bottom Layer w20: NIXIE1.d@2685,1520 Q12.1@2782.92,1550.07 ; NIXIE1.d@2694.37,1537.67 ccw(c2716.99,1580.33) 2731.16,1534.17 ccw(c2745.33,1488.01) NIXIE1.d@2702.67,1510.63
NIXIE1.3: NIXIE1.e Q13.1 | length 178.3
  Bottom Layer w20: NIXIE1.e@2670,1410 Q13.1@2767.92,1379.93 ; NIXIE1.e@2679.37,1392.33 cw(c2701.99,1349.67) 2716.16,1395.83 cw(c2730.33,1441.99) NIXIE1.e@2687.67,1419.37
NIXIE1.4: NIXIE1.f Q14.1 | length 182.5
  Bottom Layer w20: NIXIE1.f@2604.34,1300.01 cw(c2602.74,1251.75) 2637.99,1284.74 cw(c2673.25,1317.74) NIXIE1.f@2624.99,1319.34 ; NIXIE1.f@2605,1320 Q14.1@2677.86,1242.14
NIXIE1.5: NIXIE1.g Q15.1 | length 181.8
  Bottom Layer w20: NIXIE1.g@2499.61,1247.91 cw(c2474.51,1206.66) 2521.42,1218.09 cw(c2568.34,1229.51) NIXIE1.g@2527.09,1254.61 ; NIXIE1.g@2510,1265 Q15.1@2535.07,1162.08
NIXIE1.6: NIXIE1.h Q16.1 | length 105.9
  Bottom Layer w20: Q16.1@2369.93,1162.08 NIXIE1.h@2395,1265
NIXIE1.7: NIXIE1.i Q17.1 | length 103.3
  Bottom Layer w20: Q17.1@2222.14,1237.14 NIXIE1.i@2290,1315
NIXIE1.8: NIXIE1.j Q18.1 | length 96.2
  Bottom Layer w20: Q18.1@2137.08,1374.93 NIXIE1.j@2230,1400
NIXIE1.9: NIXIE1.k Q19.1 | length 183.1
  Bottom Layer w20: Q19.1@2112.08,1550.07 NIXIE1.k@2215,1520 ; NIXIE1.k@2197.46,1510.39 ccw(c2155.11,1487.19) 2168.65,1533.54 ccw(c2182.19,1579.89) NIXIE1.k@2205.39,1537.54
NIXIE2.0: NIXIE2.l Q20.1 | length 164.7
  Bottom Layer w20: Q20.1@3572.14,1697.86 NIXIE2.l@3635,1635 ; NIXIE2.l@3615,1635 ccw(c3566.72,1635) 3600.86,1669.14 ccw(c3635,1703.28) NIXIE2.l@3635,1655
NIXIE2.1: NIXIE2.c Q21.1 | length 110.3
  Bottom Layer w20: NIXIE2.c@4030,1625 Q21.1@4102.86,1707.86
NIXIE2.2: NIXIE2.d Q22.1 | length 104
  Bottom Layer w20: NIXIE2.d@4065,1525 Q22.1@4162.92,1560.07
NIXIE2.3: NIXIE2.e Q23.1 | length 180.7
  Bottom Layer w20: NIXIE2.e@4050,1415 Q23.1@4152.92,1394.93 ; NIXIE2.e@4061.17,1398.41 cw(c4088.15,1358.37) 4097.39,1405.76 cw(c4106.63,1453.15) NIXIE2.e@4066.59,1426.17
NIXIE2.4: NIXIE2.f Q24.1 | length 103
  Bottom Layer w20: NIXIE2.f@3985,1325 Q24.1@4057.86,1252.14
NIXIE2.5: NIXIE2.g Q25.1 | length 176.9
  Bottom Layer w20: NIXIE2.g@3879.81,1252.79 cw(c3855.2,1211.25) 3901.97,1223.22 cw(c3948.75,1235.2) NIXIE2.g@3907.21,1259.81 ; NIXIE2.g@3890,1270 Q25.1@3915.06,1172.08
NIXIE2.6: NIXIE2.h Q26.1 | length 176.9
  Bottom Layer w20: Q26.1@3749.93,1172.08 NIXIE2.h@3775,1270 ; NIXIE2.h@3757.79,1259.81 cw(c3716.25,1235.2) 3763.03,1223.22 cw(c3809.8,1211.25) NIXIE2.h@3785.19,1252.79
NIXIE2.7: NIXIE2.i Q27.1 | length 110.1
  Bottom Layer w20: Q27.1@3592.14,1242.14 NIXIE2.i@3670,1320
NIXIE2.8: NIXIE2.j Q28.1 | length 189.3
  Bottom Layer w20: Q28.1@3502.08,1369.93 NIXIE2.j@3610,1405 ; NIXIE2.j@3592.18,1414.08 cw(c3549.16,1436) 3564.08,1390.08 cw(c3579,1344.16) NIXIE2.j@3600.92,1387.18
NIXIE2.9: NIXIE2.k Q29.1 | length 181.8
  Bottom Layer w20: Q29.1@3492.08,1550.07 NIXIE2.k@3595,1525 ; NIXIE2.k@3577.91,1514.61 ccw(c3536.66,1489.51) 3548.09,1536.42 ccw(c3559.51,1583.34) NIXIE2.k@3584.61,1542.09
NIXIE3.0: NIXIE3.l Q30.1 | length 186
  Bottom Layer w20: Q30.1@4582.14,1712.86 NIXIE3.l@4660,1635 ; NIXIE3.l@4640,1635 ccw(c4591.72,1635) 4625.86,1669.14 ccw(c4660,1703.28) NIXIE3.l@4660,1655
NIXIE3.1: NIXIE3.c Q31.1 | length 110.1
  Bottom Layer w20: NIXIE3.c@5055,1625 Q31.1@5132.86,1702.86
NIXIE3.2: NIXIE3.d Q32.1 | length 112
  Bottom Layer w20: NIXIE3.d@5090,1525 Q32.1@5197.92,1555.07
NIXIE3.3: NIXIE3.e Q33.1 | length 189.3
  Bottom Layer w20: NIXIE3.e@5075,1415 Q33.1@5182.92,1379.93 ; NIXIE3.e@5084.08,1397.18 cw(c5106,1354.16) 5120.92,1400.08 cw(c5135.84,1446) NIXIE3.e@5092.82,1424.08
NIXIE3.4: NIXIE3.f Q34.1 | length 186
  Bottom Layer w20: NIXIE3.f@5010,1305 cw(c5010,1256.72) 5044.14,1290.86 cw(c5078.28,1325) NIXIE3.f@5030,1325 ; NIXIE3.f@5010,1325 Q34.1@5087.86,1247.14
NIXIE3.5: NIXIE3.g Q35.1 | length 179.9
  Bottom Layer w20: NIXIE3.g@4906.45,1251.92 cw(c4885.82,1208.26) 4931.28,1224.54 cw(c4976.74,1240.82) NIXIE3.g@4933.08,1261.45 ; NIXIE3.g@4915,1270 Q35.1@4950.06,1172.08
NIXIE3.6: NIXIE3.h Q36.1 | length 180.7
  Bottom Layer w20: Q36.1@4779.94,1167.08 NIXIE3.h@4800,1270 ; NIXIE3.h@4783.41,1258.83 cw(c4743.37,1231.85) 4790.76,1222.61 cw(c4838.15,1213.37) NIXIE3.h@4811.17,1253.41
NIXIE3.7: NIXIE3.i Q37.1 | length 178.9
  Bottom Layer w20: Q37.1@4622.14,1247.14 NIXIE3.i@4695,1320 ; NIXIE3.i@4675,1320 cw(c4626.72,1320) 4660.86,1285.86 cw(c4695,1251.72) NIXIE3.i@4695,1300
NIXIE3.8: NIXIE3.j Q38.1 | length 173.5
  Bottom Layer w20: Q38.1@4542.08,1374.93 NIXIE3.j@4635,1405 ; NIXIE3.j@4617.19,1414.1 cw(c4574.2,1436.08) 4589.06,1390.14 cw(c4603.92,1344.2) NIXIE3.j@4625.9,1387.19
NIXIE3.9: NIXIE3.k Q39.1 | length 173.5
  Bottom Layer w20: Q39.1@4527.08,1555.07 NIXIE3.k@4620,1525 ; NIXIE3.k@4602.19,1515.9 ccw(c4559.2,1493.92) 4574.06,1539.86 ccw(c4588.92,1585.8) NIXIE3.k@4610.9,1542.81
NIXIE4.0: NIXIE4.l Q40.1 | length 186
  Bottom Layer w20: Q40.1@5962.14,1722.86 NIXIE4.l@6040,1645 ; NIXIE4.l@6020,1645 ccw(c5971.72,1645) 6005.86,1679.14 ccw(c6040,1713.28) NIXIE4.l@6040,1665
NIXIE4.1: NIXIE4.c Q41.1 | length 96
  Bottom Layer w20: NIXIE4.c@6435,1635 Q41.1@6502.86,1702.86
NIXIE4.2: NIXIE4.d Q42.1 | length 96.2
  Bottom Layer w20: NIXIE4.d@6470,1535 Q42.1@6562.92,1560.07
NIXIE4.3: NIXIE4.e Q43.1 | length 176.9
  Bottom Layer w20: NIXIE4.e@6455,1425 Q43.1@6552.92,1399.93 ; NIXIE4.e@6465.19,1407.79 cw(c6489.8,1366.25) 6501.78,1413.03 cw(c6513.75,1459.8) NIXIE4.e@6472.21,1435.19
NIXIE4.4: NIXIE4.f Q44.1 | length 103
  Bottom Layer w20: NIXIE4.f@6390,1335 Q44.1@6462.86,1262.14
NIXIE4.5: NIXIE4.g Q45.1 | length 96.2
  Bottom Layer w20: NIXIE4.g@6295,1280 Q45.1@6320.06,1187.08
NIXIE4.6: NIXIE4.h Q46.1 | length 179.9
  Bottom Layer w20: Q46.1@6144.94,1182.08 NIXIE4.h@6180,1280 ; NIXIE4.h@6161.92,1271.45 cw(c6118.26,1250.82) 6163.72,1234.54 cw(c6209.18,1218.26) NIXIE4.h@6188.55,1261.92
NIXIE4.7: NIXIE4.i Q47.1 | length 103
  Bottom Layer w20: Q47.1@6002.14,1257.14 NIXIE4.i@6075,1330
NIXIE4.8: NIXIE4.j Q48.1 | length 180.7
  Bottom Layer w20: Q48.1@5912.08,1394.93 NIXIE4.j@6015,1415 ; NIXIE4.j@5998.41,1426.17 cw(c5958.37,1453.15) 5967.61,1405.76 cw(c5976.85,1358.37) NIXIE4.j@6003.83,1398.41
NIXIE4.9: NIXIE4.k Q49.1 | length 191
  Bottom Layer w20: Q49.1@5892.08,1575.07 NIXIE4.k@6000,1535 ; NIXIE4.k@5981.82,1526.66 ccw(c5937.93,1506.54) 5954.73,1551.8 ccw(c5971.54,1597.07) NIXIE4.k@5991.66,1553.18
NIXIE5.0: NIXIE5.l Q50.1 | length 171.8
  Bottom Layer w20: Q50.1@6992.14,1707.86 NIXIE5.l@7060,1640 ; NIXIE5.l@7040,1640 ccw(c6991.72,1640) 7025.86,1674.14 ccw(c7060,1708.28) NIXIE5.l@7060,1660
NIXIE5.1: NIXIE5.c Q51.1 | length 96
  Bottom Layer w20: NIXIE5.c@7455,1630 Q51.1@7522.86,1697.86
NIXIE5.2: NIXIE5.d Q52.1 | length 175.8
  Bottom Layer w20: NIXIE5.d@7490,1530 Q52.1@7587.92,1550.07 ; NIXIE5.d@7501.02,1546.69 ccw(c7527.61,1586.99) 7537.3,1539.69 ccw(c7546.99,1492.39) NIXIE5.d@7506.69,1518.98
NIXIE5.3: NIXIE5.e Q53.1 | length 105.9
  Bottom Layer w20: NIXIE5.e@7475,1420 Q53.1@7577.92,1394.93
NIXIE5.4: NIXIE5.f Q54.1 | length 186
  Bottom Layer w20: NIXIE5.f@7410,1310 cw(c7410,1261.72) 7444.14,1295.86 cw(c7478.28,1330) NIXIE5.f@7430,1330 ; NIXIE5.f@7410,1330 Q54.1@7487.86,1252.14
NIXIE5.5: NIXIE5.g Q55.1 | length 183.1
  Bottom Layer w20: NIXIE5.g@7305.39,1257.46 cw(c7282.19,1215.11) 7328.54,1228.65 cw(c7374.89,1242.19) NIXIE5.g@7332.54,1265.39 ; NIXIE5.g@7315,1275 Q55.1@7345.07,1172.08
NIXIE5.6: NIXIE5.h Q56.1 | length 183.1
  Bottom Layer w20: Q56.1@7169.93,1172.08 NIXIE5.h@7200,1275 ; NIXIE5.h@7182.46,1265.39 cw(c7140.11,1242.19) 7186.46,1228.65 cw(c7232.81,1215.11) NIXIE5.h@7209.61,1257.46
NIXIE5.7: NIXIE5.i Q57.1 | length 186
  Bottom Layer w20: Q57.1@7017.14,1247.14 NIXIE5.i@7095,1325 ; NIXIE5.i@7075,1325 cw(c7026.72,1325) 7060.86,1290.86 cw(c7095,1256.72) NIXIE5.i@7095,1305
NIXIE5.8: NIXIE5.j Q58.1 | length 181.8
  Bottom Layer w20: Q58.1@6932.08,1384.93 NIXIE5.j@7035,1410 ; NIXIE5.j@7017.91,1420.39 cw(c6976.66,1445.49) 6988.09,1398.58 cw(c6999.51,1351.66) NIXIE5.j@7024.61,1392.91
NIXIE5.9: NIXIE5.k Q59.1 | length 181.8
  Bottom Layer w20: Q59.1@6917.08,1555.07 NIXIE5.k@7020,1530 ; NIXIE5.k@7002.91,1519.61 ccw(c6961.66,1494.51) 6973.09,1541.42 ccw(c6984.51,1588.34) NIXIE5.k@7009.61,1547.09
OSCIN: C26.2 R21.1 U1.5 Y1.2 | length 1396.6
  Bottom Layer w10: C26.2@4929.37,585 5014.37,585 R21.1@5015,585.63 5104.37,585.63 ; C26.2@4938.25,576.12 cw(c4959.69,554.68) 4959.69,585 cw(c4959.69,615.32) C26.2@4938.25,593.88 ; C26.2@4945.32,569.05 cw(c4983.83,530.54) 4983.83,585 cw(c4983.83,639.46) C26.2@4945.32,600.95 ; 4957.05,585 ccw(c4957.05,641.61) R21.1@4997.08,601.58 ; 4960.09,585 cw(c4960.09,532.69) R21.1@4997.08,569.68 ; 4981.19,585 ccw(c4981.19,617.47) R21.1@5004.15,594.51 ; 4984.23,585 cw(c4984.23,556.83) R21.1@5004.15,576.75 ; R21.1@5025.85,576.75 cw(c5047.29,555.31) 5047.29,585.63 cw(c5047.29,615.95) R21.1@5025.85,594.51 ; R21.1@5032.92,569.68 cw(c5071.43,531.17) 5071.43,585.63 cw(c5071.43,640.09) R21.1@5032.92,601.58 ; 5121.19,568.81 cw(c5078.2,525.81) Y1.2@5139,525.17 ; 5127.69,562.31 ccw(c5155,589.63) Y1.2@5155,551 ; Y1.2@5129,525.27 ccw(c5044.91,526.16) 5104.37,585.63 ; 5138.01,551.99 cw(c5111.49,525.46) Y1.2@5149,525.06 ; Y1.2@5175,531 ccw(c5175,581.7) 5210.85,545.85 ; Y1.2@5175,541 ccw(c5175,615.84) 5227.92,562.92 ; Y1.2@5175,551 ccw(c5175,649.98) 5244.99,579.99 ; Y1.2@5201,525 cw(c5227.56,525) 5208.78,543.78 ; U1.5@5453.58,705.47 5370.47,705.47 5190,525 Y1.2@5165,525 5104.37,585.63
OSCOUT: C25.2 R21.2 U1.6 Y1.1 | length 1284
  Bottom Layer w10: C25.2@4929.37,665 4930,664.37 R21.2@5015,664.37 5104.37,664.37 ; C25.2@4938.25,656.12 cw(c4958.17,636.2) 4958.17,664.37 ; C25.2@4938.25,673.88 ccw(c4961.21,696.84) 4961.21,664.37 ; C25.2@4945.32,649.05 cw(c4982.31,612.06) 4982.31,664.37 ; C25.2@4945.32,680.95 ccw(c4985.35,720.98) 4985.35,664.37 ; R21.2@4997.08,648.42 ccw(c4958.57,609.91) 4958.57,664.37 ccw(c4958.57,718.83) R21.2@4997.08,680.32 ; R21.2@5004.15,655.49 ccw(c4982.71,634.05) 4982.71,664.37 ccw(c4982.71,694.69) R21.2@5004.15,673.25 ; R21.2@5025.85,655.49 cw(c5047.29,634.05) 5047.29,664.37 cw(c5047.29,694.69) R21.2@5025.85,673.25 ; R21.2@5032.92,648.42 cw(c5071.43,609.91) 5071.43,664.37 cw(c5071.43,718.83) R21.2@5032.92,680.32 ; 5121.19,681.19 ccw(c5078.19,724.19) Y1.1@5139,724.83 ; 5127.69,687.69 cw(c5155,660.37) Y1.1@5155,699 ; Y1.1@5129,724.73 cw(c5044.9,723.84) 5104.37,664.37 ; 5138.01,698.01 ccw(c5111.48,724.54) Y1.1@5149,724.94 ; Y1.1@5186.31,713.69 cw(c5214.01,685.99) 5214.01,725.16 ; Y1.1@5186.31,736.31 ccw(c5213.25,763.25) 5213.25,725.16 ; Y1.1@5193.38,706.62 cw(c5238.15,661.85) 5238.15,725.16 ; Y1.1@5193.38,743.38 ccw(c5237.39,787.39) 5237.39,725.16 ; U1.6@5453.58,725.16 5165.16,725.16 Y1.1@5165,725 5104.37,664.37
QH'.SI.0: H0'.14 H0.9 | length 354.7
  Bottom Layer w10: H0'.14@1252.05,2331.05 cw(c1240.1,2319.1) 1257,2319.1 cw(c1273.9,2319.1) H0'.14@1261.95,2331.05 ; H0'.14@1257,2364 1257,2313 1280,2290 1415,2290 1437,2312 H0.9@1437,2364 ; H0.9@1432.05,2331.05 cw(c1420.1,2319.1) 1437,2319.1 cw(c1453.9,2319.1) H0.9@1441.95,2331.05
QH'.SI.1: H1'.14 H1.9 | length 344.7
  Bottom Layer w10: H1'.14@2312.05,2331.05 cw(c2300.1,2319.1) 2317,2319.1 cw(c2333.9,2319.1) H1'.14@2321.95,2331.05 ; H1'.14@2317,2364 2317,2318 2340,2295 2475,2295 2497,2317 H1.9@2497,2364 ; H1.9@2492.05,2331.05 cw(c2480.1,2319.1) 2497,2319.1 cw(c2513.9,2319.1) H1.9@2501.95,2331.05
QH'.SI.2: H2'.14 H2.9 | length 352.7
  Bottom Layer w10: H2'.14@3632.05,2331.05 cw(c3620.1,2319.1) 3637,2319.1 cw(c3653.9,2319.1) H2'.14@3641.95,2331.05 ; H2'.14@3637,2364 3637,2308 3655,2290 3790,2290 3812,2312 H2.9@3812,2364 ; H2.9@3807.05,2331.05 cw(c3795.1,2319.1) 3812,2319.1 cw(c3828.9,2319.1) H2.9@3816.95,2331.05
QH'.SI.3: H3'.14 H3.9 | length 388.5
  Bottom Layer w10: H3'.14@4677.05,2336.05 cw(c4665.1,2324.1) 4682,2324.1 cw(c4698.9,2324.1) H3'.14@4686.95,2336.05 ; H3'.14@4682,2369 4682,2318 4700,2300 4885,2300 4897,2312 H3.9@4897,2369 ; H3.9@4892.05,2336.05 cw(c4880.1,2324.1) 4897,2324.1 cw(c4913.9,2324.1) H3.9@4901.95,2336.05
QH'.SI.4: H4'.14 H4.9 | length 343.5
  Bottom Layer w10: H4'.14@6047.05,2336.05 cw(c6035.1,2324.1) 6052,2324.1 cw(c6068.9,2324.1) H4'.14@6056.95,2336.05 ; H4'.14@6052,2369 6052,2318 6065,2305 6215,2305 6232,2322 H4.9@6232,2369 ; H4.9@6227.05,2336.05 cw(c6215.1,2324.1) 6232,2324.1 cw(c6248.9,2324.1) H4.9@6236.95,2336.05
QH'.SI.5: H5'.14 H5.9 | length 355.6
  Bottom Layer w10: H5'.14@7077.05,2336.05 cw(c7065.1,2324.1) 7082,2324.1 cw(c7098.9,2324.1) H5'.14@7086.95,2336.05 ; H5'.14@7082,2369 7082,2318 7100,2300 7250,2300 7267,2317 H5.9@7267,2369 ; H5.9@7262.05,2336.05 cw(c7250.1,2324.1) 7267,2324.1 cw(c7283.9,2324.1) H5.9@7271.95,2336.05
REMOTE: R150.2 REMOTE.1 U1.46 | length 1838.2
  Top Layer w10: REMOTE.1@4465,575 5415,575 5495,495 v1(5545,495) ; REMOTE.1@4475.27,564.73 cw(c4500.07,539.93) 4500.07,575 cw(c4500.07,610.07) REMOTE.1@4475.27,585.27 ; REMOTE.1@4482.34,557.66 cw(c4524.21,515.79) 4524.21,575 cw(c4524.21,634.21) REMOTE.1@4482.34,592.34 ; v1@5541.46,491.46 ccw(c5532.93,482.93) 5532.93,495 ccw(c5532.93,507.07) v1@5541.46,498.54
  Bottom Layer w10: REMOTE.1@4447.66,592.34 ccw(c4407.31,632.69) 4464.37,632.69 ; R150.2@4448.42,742.08 cw(c4409.91,703.57) 4464.37,703.57 cw(c4518.83,703.57) R150.2@4480.32,742.08 ; REMOTE.1@4454.73,585.27 ccw(c4431.45,608.55) 4464.37,608.55 ; R150.2@4455.49,749.15 cw(c4434.05,727.71) 4464.37,727.71 cw(c4494.69,727.71) R150.2@4473.25,749.15 ; 4464.37,611.59 ccw(c4501.59,611.59) REMOTE.1@4475.27,585.27 ; 4464.37,635.74 ccw(c4525.74,635.74) REMOTE.1@4482.34,592.34 ; R150.2@4464.37,760 4464.37,575.63 REMOTE.1@4465,575 ; v1@5541.46,498.54 ccw(c5530.27,509.73) 5546.1,509.73 ; v1(5545,495) 5546.1,496.1 U1.46@5546.1,573.58
REST: C20.2 R20.2 U1.7 | length 1117.2
  Bottom Layer w10: C20.2@4755,739.37 4968.74,739.37 R20.2@4970,740.63 5055.63,740.63 5105,790 5225,790 5269.84,745.16 5270.16,745.16 ; C20.2@4765.85,730.49 cw(c4787.29,709.05) 4787.29,739.37 cw(c4787.29,769.69) C20.2@4765.85,748.25 ; C20.2@4772.92,723.42 cw(c4811.43,684.91) 4811.43,739.37 cw(c4811.43,793.83) C20.2@4772.92,755.32 ; 4910.53,739.37 ccw(c4910.53,798.13) R20.2@4952.08,756.58 ; 4916.61,739.37 cw(c4916.61,689.21) R20.2@4952.08,724.68 ; 4934.67,739.37 ccw(c4934.67,773.99) R20.2@4959.15,749.51 ; R20.2@4980.85,731.75 cw(c5002.29,710.31) 5002.29,740.63 cw(c5002.29,770.95) R20.2@4980.85,749.51 ; R20.2@4987.92,724.68 cw(c5026.43,686.17) 5026.43,740.63 cw(c5026.43,795.09) R20.2@4987.92,756.58 ; 5270.16,744.84 U1.7@5453.58,744.84
SWCLK: ST_LINK.2 U1.37 | length 747.9
  Bottom Layer w10: U1.37@5723.27,573.58 5723.27,526.73 5755,495 6280,495 6300,515 ; ST_LINK.2@6286.71,539.39 cw(c6270.99,515) 6300,515 ; ST_LINK.2@6300,560 6300,515 ; ST_LINK.2@6313.29,539.39 ccw(c6329.01,515) 6300,515
SWDIO: ST_LINK.1 U1.34 | length 856.6
  Bottom Layer w10: U1.34@5776.42,666.1 6363.9,666.1 6400,630 ST_LINK.1@6400,560 ; ST_LINK.1@6382.66,577.34 ccw(c6340.79,619.21) 6400,619.21 ccw(c6459.21,619.21) ST_LINK.1@6417.34,577.34 ; ST_LINK.1@6389.73,570.27 ccw(c6364.93,595.07) 6400,595.07 ccw(c6435.07,595.07) ST_LINK.1@6410.27,570.27
pads on no net: H0'.2 H0'.3 H0'.7 H0'.9 H1'.7 H1'.9 H2'.2 H2'.3 H2'.7 H2'.9 H3'.7 H3'.9 H4'.2 H4'.3 H4'.7 H4'.9 H5'.2 H5'.3 H5'.7 H5'.9 J1.3 NIXIE0.b NIXIE0.m NIXIE1.b NIXIE1.m NIXIE2.b NIXIE2.m NIXIE3.b NIXIE3.m NIXIE4.b NIXIE4.m NIXIE5.b NIXIE5.m U1.1 U1.2 U1.3 U1.4 U1.10 U1.38 U1.39 U1.40 U1.42 U1.43
copper on no net:
  other v4: 420,420 8050,425 8050,2525 400,2530
  other v6: 6815,640 6815,935.28

## Polygon pours and split planes (outlines as drawn)
GND on Top Layer "Top Layer-No Net" (solid, pour order 2): 305,295 300,300 300,2650 8180,2650 8180,295 305,295
GND on Bottom Layer "Top Layer-No Net" (solid, pour order 4): 300,295 8180,295 8180,2650 8185,2655 305,2655 305,295

## Keep-outs
Keep-Out Layer:
  lines w10: 380.02,2649.79 ccw(c388.7,2563.7) 302.4,2570 302.4,395 ccw(c401.2,393.8) 400,295 ; 380,2650 8065,2650 cw(c8065,2535) 8180,2535 8180,425 ; 395,295 8075,295 ccw(c8065,410) 8180,420

## Other copper
Bottom Layer:
  rectangle net NetJ1_1: 535,1720 775,2160

## Silkscreen, mask and mechanical layers (free items; w line width, h text height)
Bottom Overlay:
  text "GND" at 6200,495 h30 r225
  text "CLK" at 6305,495 h30 r225
  text "DIO" at 6405,490 h30 r225